# EAGLE board template (EAGLE 6.6.0)

No outline drawn. Coordinates in mm, seen from the top.
Copper layers (1*16): Top 0.035mm / dielectric 1.5mm / Bottom 0.035mm
Design rules "default": minimum track width 10mil, minimum drill 24mil, track to track 8mil, track to pad 8mil, pad to pad 8mil, via to via 8mil, smd to smd 8mil, copper to edge 40mil, drill to drill 8mil, minimum pad ring 10mil, minimum via ring 8mil, stop-mask expansion 4mil, vias tented up to drill 0mil, thermal gap 10mil

## Footprints (pad centres in the part's own frame; a part is rotated, then mirrored left to right if it is on the bottom)
6UDRILLS = hole 0.25: 0.312,0.875; 0.312,1.5; 0.312,0.25; 18.688,0.875; 18.688,1.5; 18.688,0.25; 0.312,2.625; 0.312,3.25; 0.312,2; 18.688,2.625; 18.688,3.25; 18.688,2; 0.312,4.375; 0.312,5; 0.312,3.75; 18.688,4.375; 18.688,5; 18.688,3.75; 0.312,6.125; 0.312,6.75; 0.312,5.5; 18.688,6.125; 18.688,6.75; 18.688,5.5; 0.312,7.875; 0.312,8.5; 0.312,7.25; 18.688,7.875; 18.688,8.5; 18.688,7.25; 0.312,9.625; 0.312,10.25; 0.312,9; 18.688,9.625; 18.688,10.25; 18.688,9

## Placement (x,y rotation side)
E$1  [6UDRILLS]  0,0 0 top
E$2  [6U]  0,0 0 top

## Library data of the parts
E$1 E$2 = rack

## Text on the board
tPlace: PDP-8/L